# Altium PCB Copy of linobit-PCB.PcbDoc
Units mm, origin at the board's own origin, x right, y up, seen from the top; angles counter-clockwise.
Board outline 110 x 58 mm, 2 copper layers (Top Layer, Bottom Layer); 35 components, 57 nets, 228 pads, 59 vias.
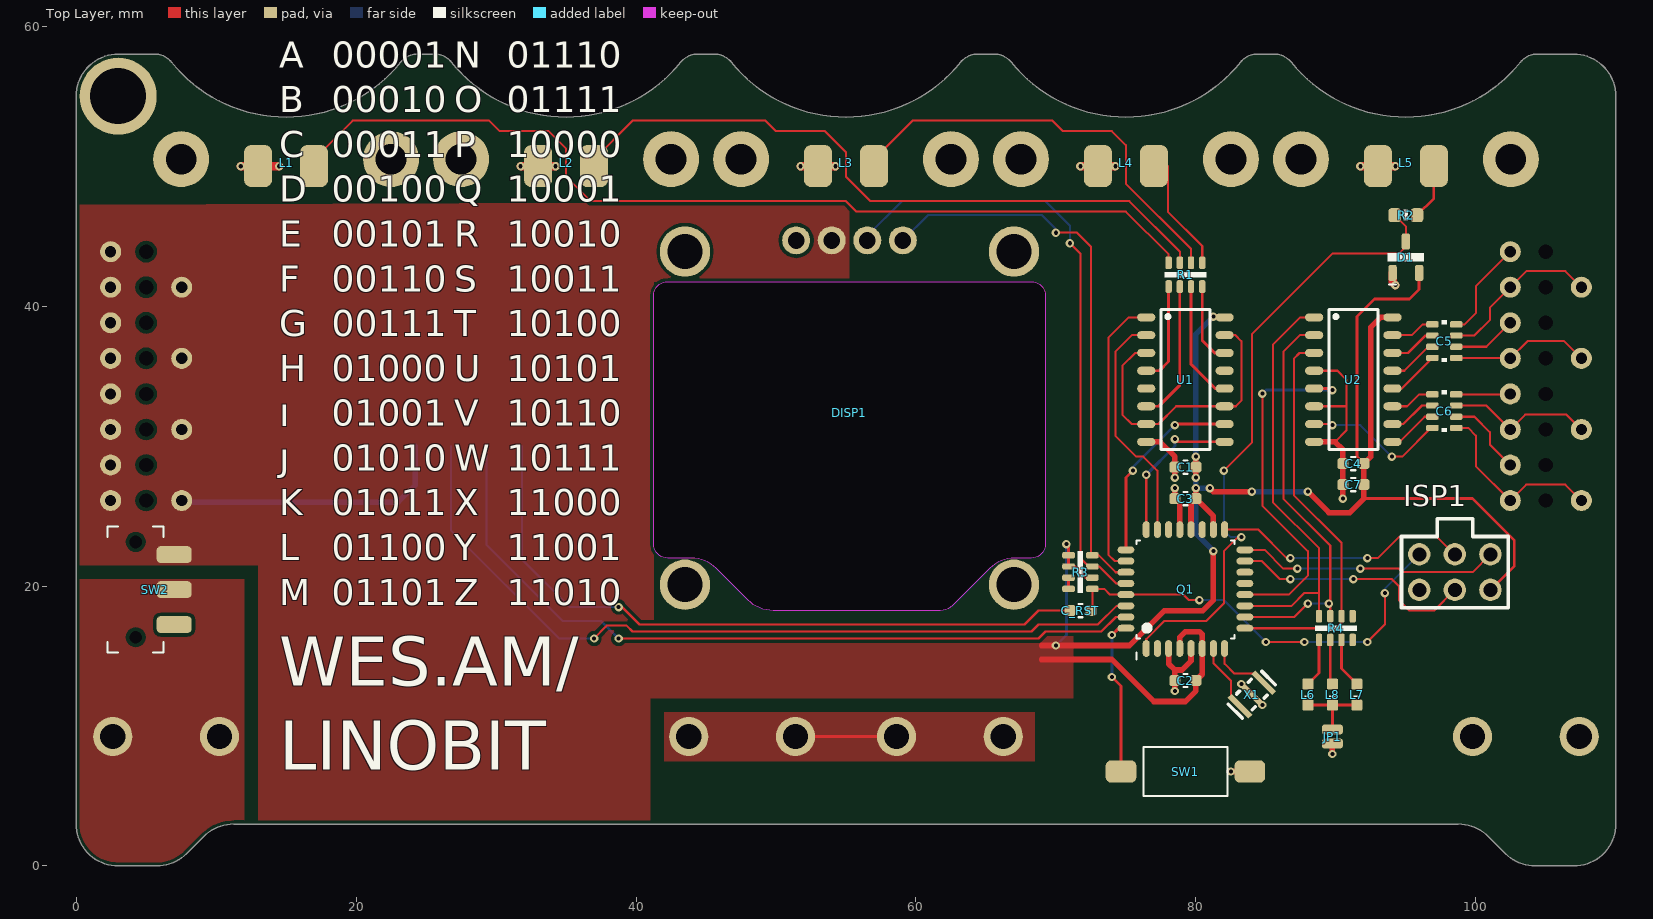
[diagram p0: Top Layer view]
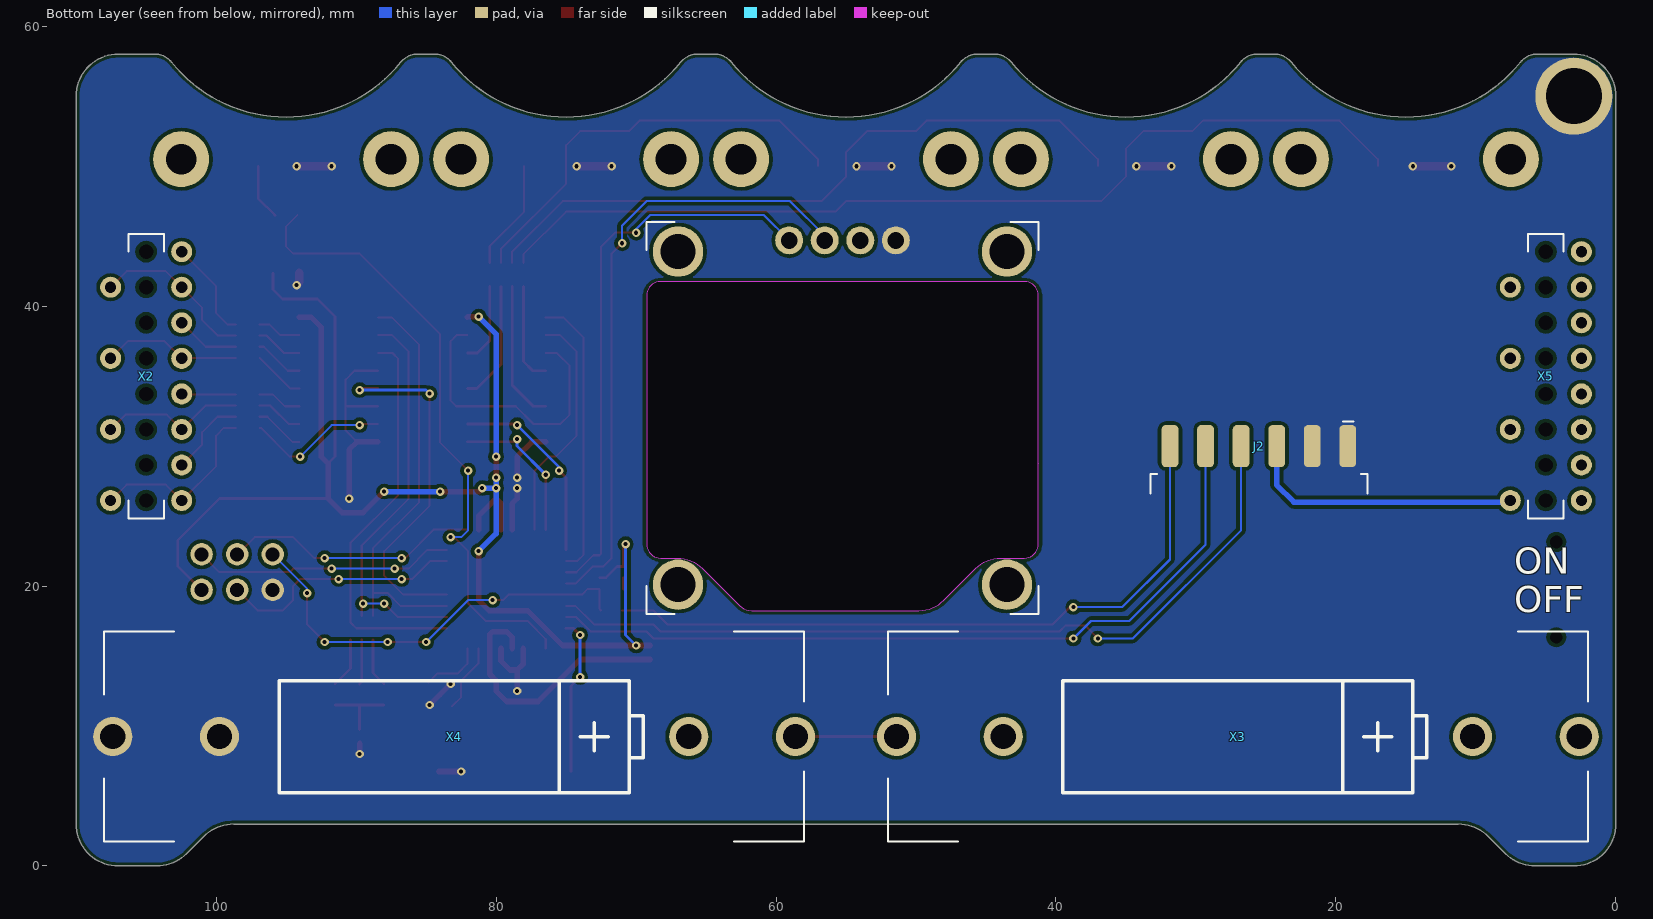
[diagram p1: Bottom Layer view, seen from below]

## Layer stack, top to bottom
Top Solder: solder mask 0.0102, Solder Resist, Dk 3.5
Top Layer: signal copper 0.0356
Dielectric 1: dielectric 0.32, FR-4, Dk 4.8
Bottom Layer: signal copper 0.0356
Bottom Solder: solder mask 0.0102, Solder Resist, Dk 3.5

## Board outline
3,0 5.757,0 ccw(c5.757,3) 7.879,0.879 9.121,2.121 cw(c11.243,0) 11.243,3 98.757,3 cw(c98.757,0) 100.879,2.121 102.121,0.879 ccw(c104.243,3) 104.243,0 107,0 ccw(c107,3) 110,3 110,55 ccw(c107,55) 107,58 104.367,58 ccw(c104.367,56.5) 103.197,57.437 103.197,57.438 cw(c95,64) 86.803,57.438 86.803,57.437 ccw(c85.633,56.5) 85.633,58 84.367,58 ccw(c84.367,56.5) 83.197,57.437 83.197,57.438 cw(c75,64) 66.803,57.438 66.803,57.437 ccw(c65.633,56.5) 65.633,58 64.367,58 ccw(c64.367,56.5) 63.197,57.437 63.197,57.438 cw(c55,64) 46.803,57.438 46.803,57.437 ccw(c45.633,56.5) 45.633,58 44.367,58 ccw(c44.367,56.5) 43.197,57.437 43.197,57.438 cw(c35,64) 26.803,57.438 26.803,57.437 ccw(c25.633,56.5) 25.633,58 24.367,58 ccw(c24.367,56.5) 23.197,57.437 23.197,57.438 cw(c15,64) 6.803,57.438 6.803,57.437 ccw(c5.633,56.5) 5.633,58 3,58 ccw(c3,55) 0,55 0,3 ccw(c3,3)
cut-out: 41.23,28.75

## Design rules (kind name [scope] priority, off if disabled: settings)
BoardOutlineClearance BoardOutlineClearance-Mid [OnLayer('Mid1') or OnLayer('Mid2')] p1: gap=0.5 ignorepadtopadclearanceinfootprint=FALSE
BoardOutlineClearance [All] p2: gap=0.25 ignorepadtopadclearanceinfootprint=FALSE except(0: Arc-SplitContinuation Track-SplitContinuation SMDPad-SplitContinuation THPad-SplitContinuation Via-SplitContinuation Fill-SplitContinuation Poly-SplitContinuation Region-SplitContinuation Text-SplitContinuation)
Clearance Clearance-xPP-xTP-xTT [All] p1: gap=0.15 ignorepadtopadclearanceinfootprint=FALSE except(0: Arc-Hole Track-Hole SMDPad-Hole THPad-Hole Via-Hole Fill-Hole Poly-Hole Region-Hole Text-Hole; 0.25: Arc-Fill Arc-Poly Arc-Region Track-Fill Track-Poly Track-Region SMDPad-Fill SMDPad-Poly SMDPad-Region THPad-Fill THPad-Poly THPad-Region Via-Fill Via-Poly Via-Region Fill-Fill Fill-Poly Fill-Region Poly-Poly Poly-Region Region-Region)
ComponentClearance [All] p1: gap=0.25 collisioncheckmode=3 verticalgap=0.25 showdistances=FALSE
DiffPairsRouting DiffPairsRouting_1 [InDifferentialPair('RS485')] p1: maxlimit=1 minlimit=0.2 mostfreqgap=0.2 toplayer_minwidth=0.2 toplayer_maxwidth=0.6 toplayer_prefwidth=0.6 bottomlayer_minwidth=0.2 bottomlayer_maxwidth=0.6 bottomlayer_prefwidth=0.6 maxuncoupledlength=12.7
DiffPairsRouting [All] p2: maxlimit=0.25 minlimit=0.25 mostfreqgap=0.25 toplayer_minwidth=0.381 toplayer_maxwidth=0.381 toplayer_prefwidth=0.381 bottomlayer_minwidth=0.381 bottomlayer_maxwidth=0.381 bottomlayer_prefwidth=0.381 maxuncoupledlength=12.5
Height [All] p1: minheight=0 maxheight=25 prefheight=12.5
HoleSize HoleSize-PTH [All] p1: absolutevalues=TRUE maxlimit=6 minlimit=0.25 maxpercent=80.000 minpercent=20.000
HoleToHoleClearance [All] p1: gap=0.35 allowstackedmicrovias=TRUE
MinimumAnnularRing "Minimum IAR  >0.45mm" [((ObjectKind = 'Pad') OR (ObjectKind = 'Via')) And (Layer = 'MultiLayer') And (HoleDiameter > AsMM(0.45))] p1: minimumring=0.175 // minimum inner annular ring for pads > 0.45mm finished hole size
MinimumAnnularRing "Minimum IAR <=0.45mm" [((ObjectKind = 'Pad') OR (ObjectKind = 'Via')) And (Layer = 'MultiLayer') And (HoleDiameter <= AsMM(0.45))] p2: minimumring=0.15 // minimum inner annular ring for pads <= 0.45mm finished hole size
MinimumSolderMaskSliver [All] p1: minsoldermaskwidth=0.08
PlaneClearance PlaneClearance-IPI [All] p1: clearance=0.5
PlaneConnect [All] p1: planeconnectstyle=Relief reliefexpansion=0.175 reliefentries=4 reliefconductorwidth=0.2 reliefairgap=0.2
PolygonConnect PolygonConnect-xTW [All] p1: connectstyle=Direct reliefconductorwidth=0.2 reliefentries=4 polygonreliefangle="90 Angle" airgapwidth=0.2
RoutingCorners [All] p1: cornerstyle=45-Degree minsetback=2.5 maxsetback=2.5
RoutingVias "RoutingVias 0.3mm" [All] p1: holewidth=0.3 width=0.6 viastyle="Through Hole" minholewidth=0.3 minwidth=0.6 maxholewidth=0.5 maxwidth=0.8 // finishet hole size <= 0.45mm
SilkToSilkClearance [All] p1: silktosilkclearance=0.2
SilkToSolderMaskClearance SilkscreenOverComponentPads [IsPad] p1: minsilkscreentomaskgap=0.2 clearancetoexposedcopper=TRUE
SolderMaskExpansion "0.3mm Via" [(ObjectKind = 'Via') And (HoleDiameter = AsMM(0.3))] p1: expansion=-0.15 soldermaskfromhole=TRUE
SolderMaskExpansion [All] p2: expansion=0
UnRoutedNet [All] p1: checkbadconnections=TRUE
Width Width-xTW [All] p1: maxlimit=1.5 minlimit=0.15 preferedwidth=0.2
18 further rules are at their usual default settings.

## Components (designator, comment, footprint, x,y, rotation, side; value= is the part's Value field where it differs from the comment)
C1 "*" C0603_N 79.25,28.5 r180 top
C2 "*" C0603_N 79.25,13.25 r180 top
C3 "*" C0603_N 79.25,26.25 r180 top
C4 "*" C0603_N 91.25,28.75 r180 top
C5 "; *" "C0612 Array 4 Caps" 97.75,37.5 r270 top
C6 "; *" "C0612 Array 4 Caps" 97.75,32.5 r270 top
C7 "*" C0603_N 91.25,27.25 r180 top
C_RST "100nF" C0603_N 71.75,18.25 r0 top
D1 "Diode Dual Series" SOT23_N 95,43.5 r90 top
DISP1 "Display I2C OLED" "Display OLED 128x64 0.96in" 55.25,32 r0 top
ISP1 "ISP" "ISP PTH" 98.5,21 r270 top
J2 "FTDI Header" "Header 5W SMD 0.1\"" 25.5,30 r0 bottom
JP1 "Jumper 2W" "Jumper SMD 2W NO" 89.75,9.25 r270 top
L1 "linobyte-coil" linobyte-coil 15,48 r270 top
L2 "linobyte-coil" linobyte-coil 35,48 r270 top
L3 "linobyte-coil" linobyte-coil 55,48 r270 top
L4 "linobyte-coil" linobyte-coil 75,48 r270 top
L5 "linobyte-coil" linobyte-coil 95,48 r270 top
L6 "LED" "LED 0603/1608" 88,12.25 r270 top
L7 "LED" "LED 0603/1608" 91.5,12.25 r270 top
L8 "LED" "LED 0603/1608" 89.75,12.25 r270 top
Q1 "Atmega328P" TQFP32 79.25,19.75 r90 top
R1 "; *" YC164 79.25,42.25 r0 top
R2 "*" R0603 95,46.5 r180 top
R3 "; *" YC164 71.75,21 r90 top
R4 "; *" YC164 90,17 r0 top
SW1 "Switch 2P SPST NO" "TACT FSMSM" 79.25,6.75 r0 top
SW2 "SW SPDT" "SW SPDT JS102011SAQN" 4.25,19.75 r270 top
U1 "MC14043" SOIC16 79.25,34.75 r0 top
U2 "74HC138 - SOIC16" SOIC16 91.25,34.75 r0 top
X1 "Resonator" Resonator 84,12.25 r45 top
X2 "Connector 8W" BCS-108-L-S-PE 105,35 r270 bottom
X3 "Battery Holder AA" "Battery Holder AA" 27,9.25 r0 bottom
X4 "Battery Holder AA" "Battery Holder AA" 83,9.25 r0 bottom
X5 "Connector 8W" BCS-108-L-S-PE 5,35 r270 bottom

## Footprints (in the part's own frame and the unit in brackets; to place one, negate y for a bottom-side part, rotate by r counter-clockwise, add the part's x,y. Pads: shape width x height; smd on the part's side, far side on the other; paste and mask are expansions set on the pad)
"Battery Holder AA" [mm] "Keystone 92 x2"
  round 2.8 hole 1.8: +(-24.385,0) +(-16.765,0) -(16.765,0) -(24.385,0)
  silkscreen extent -25,-7.5 25,7.5, body extent -26.05,-7.49 26.05,7.49, height 15.5
BCS-108-L-S-PE [mm] "Header 8 through board 2.54mm 0.1in"
  round 1.5 hole 0.8 paste+0 mask+0.102: 1(-8.89,2.54) 2(-6.35,-2.54) 2(-6.35,2.54) 3(-3.81,2.54) 4(-1.27,-2.54) 4(-1.27,2.54) 5(1.27,2.54) 6(3.81,-2.54) 6(3.81,2.54) 7(6.35,2.54) 8(8.89,-2.54) 8(8.89,2.54)
  oval 0x2 hole 1.02 unplated paste+0 mask+0.102: ""(-8.89,0) ""(-6.35,0) ""(-3.81,0) ""(-1.27,0) ""(1.27,0) ""(3.81,0) ""(6.35,0) ""(8.89,0)
  silkscreen extent -10.16,-1.27 10.16,1.27, body extent -10.16,-2.67 10.16,2.67, height 7.37
C0603_N [mm] "Capacitor, Yageo CC Class2, SM0603, IPC Medium Density"
  rrect50% 0.8x0.8 smd: 1(-0.75,0) 2(0.75,0)
  silkscreen extent -0.15,-0.48 0.15,0.48, body extent -0.9,-0.5 0.9,0.5, height 0.9
"C0612 Array 4 Caps" [mm]
  rrect50% 0.45x0.9 smd: 1(-1.2,-0.85) 2(-0.4,-0.85) 3(0.4,-0.85) 4(1.2,-0.85) 5(1.2,0.85) 6(0.4,0.85) 7(-0.4,0.85) 8(-1.2,0.85)
  silkscreen extent -1.5,-0.2 1.5,0.2, body extent -1.68,-0.88 1.68,0.88, height 0.71
"Display OLED 128x64 0.96in" [mm]
  round 2 hole 1.2: 1(-3.81,12.7) 2(-1.27,12.7) 3(1.27,12.7) 4(3.81,12.7)
  round 3.6 hole 2.5: TAB(-11.75,-11.9) TAB(-11.75,11.9) TAB(11.75,-11.9) TAB(11.75,11.9)
  Keep-Out Layer board cut-out: -13,9.75 13,9.75 13.383,9.674 13.707,9.457 13.924,9.133 14,8.75 14,8.75 14,-9 13.924,-9.383 13.707,-9.707 13.383,-9.924 13,-10 13,-10 11.802,-10 10.83,-10.193 10.006,-10.744 10.006,-10.744 7.354,-13.396 6.962,-13.658 6.5,-13.75 6.5,-13.75 -5.448,-13.75 -6.42,-13.557 -7.244,-13.006 -7.244,-13.006 -9.506,-10.744 -10.33,-10.193 -11.302,-10 -11.302,-10 -13,-10 -13.383,-9.924 -13.707,-9.707 -13.924,-9.383 -14,-9 -14,-9 -14,8.75 -13.924,9.133 -13.707,9.457 -13.383,9.674 -13,9.75
"Header 5W SMD 0.1\"" [mm]
  rrect50% 1.2x3 smd: 1(-6.35,0) 2(-3.81,0) 3(-1.27,0) 4(1.27,0) 5(3.81,0) 6(6.35,0)
  silkscreen extent -7.75,-1.75 7.75,3.4, body extent -7.62,-1.09 7.62,11.86, height 3.17
"ISP PTH" [mm]
  round 1.6 hole 1 paste-2: 1(-1.27,2.54) 2(-1.27,0) 3(-1.27,-2.54) 4(1.27,-2.54) 5(1.27,0) 6(1.27,2.54)
  silkscreen extent -3.81,-3.81 2.54,3.81
"Jumper SMD 2W NO" [mm]
  rrect50% 0.7x1.5 smd paste-1: 1(-0.5,0) 2(0.5,0)
"LED 0603/1608" [mm] "Chip Diode, 2-Leads, Body 1.60x0.80mm, IPC Medium Density"
  rrect30% 0.8x0.8 smd: 1(0.75,0) 2(-0.75,0)
  silkscreen extent 0.13,-0.23 0.13,0.23, body extent -0.8,-0.4 0.8,0.4, height 0.53
linobyte-coil [mm]
  rrect50% 3x2 smd: 1(-2,2) 2(-2,-2)
  round 4 / inner round 2.6 / far side round 4 hole 2.2: M2(-2.5,7.5) M2(-2.5,-7.5)
  body extent -24,-9.5 0,9.5, height 2
R0603 [mm] "Chip Resistor; Body 1.6 x 0.9 mm (LxW typ)"
  rrect50% 0.9x1 smd: 1(-0.8,0) 2(0.8,0)
  silkscreen extent -0.15,-0.38 0.15,0.38, body extent -0.8,-0.4 0.8,0.4, height 0.45
Resonator [mm] "PRQC Type C - Kyocera"
  rect 0.4x2.1 smd: 1(-1.2,0) 2(0,0) 3(1.2,0)
  silkscreen extent -1.68,-0.8 1.68,0.8, body extent -1.6,-0.65 1.6,0.65, height 0.7
SOIC16 [mm]
  oval 1.3x0.58 smd: 1(-2.8,4.445) 2(-2.8,3.175) 3(-2.8,1.905) 4(-2.8,0.635) 5(-2.8,-0.635) 6(-2.8,-1.905) 7(-2.8,-3.175) 8(-2.8,-4.445) 9(2.8,-4.445) 10(2.8,-3.175) 11(2.8,-1.905) 12(2.8,-0.635) 13(2.8,0.635) 14(2.8,1.905) 15(2.8,3.175) 16(2.8,4.445)
  silkscreen extent -1.75,-5 1.75,5, body extent -3,-4.95 3,4.95, height 1.4
SOT23_N [mm] "SOT23, 3-Leads, Body 2.9x1.3mm, Pitch 0.95mm, Lead Span 2.5mm, IPC Medium Density"
  rrect50% 1.15x0.6 smd: 1(-1.125,0.95) 2(-1.125,-0.95) 3(1.125,0)
  silkscreen extent -1.95,-1.3 0.3,1.3, body extent -0.7,-1.5 0.7,1.5, height 1.1
"SW SPDT JS102011SAQN" [mm]
  rrect50% 1.2x2.5 smd paste+0 mask+0.102: 1(-2.5,2.75) 2(0,2.75) 3(2.5,2.75)
  rrect50% 0x2.5 hole 0.9 unplated paste+0 mask+0.102: ""(-3.4,0) ""(3.4,0)
  silkscreen extent -4.5,-2 4.5,2, body extent -4.5,-4.5 4.5,2, height 3.5
"TACT FSMSM" [mm]
  rrect50% 2.2x1.6 smd paste+0 mask+0.102: 1(-4.6,0) 2(4.6,0)
  silkscreen extent -3,-1.75 3,1.75
TQFP32 [mm]
  oval 1.2x0.5 smd: 1(-4.212,2.8) 2(-4.212,2) 3(-4.212,1.2) 4(-4.212,0.4) 5(-4.212,-0.4) 6(-4.212,-1.2) 7(-4.212,-2) 8(-4.212,-2.8) 17(4.288,-2.8) 18(4.288,-2) 19(4.288,-1.2) 20(4.288,-0.4) 21(4.288,0.4) 22(4.288,1.2) 23(4.288,2) 24(4.288,2.8)
  oval 0.5x1.2 smd: 9(-2.762,-4.25) 10(-1.962,-4.25) 11(-1.162,-4.25) 12(-0.362,-4.25) 13(0.438,-4.25) 14(1.238,-4.25) 15(2.038,-4.25) 16(2.838,-4.25) 25(2.838,4.25) 26(2.038,4.25) 27(1.238,4.25) 28(0.438,4.25) 29(-0.362,4.25) 30(-1.162,4.25) 31(-1.962,4.25) 32(-2.762,4.25)
  silkscreen extent -5,-3.5 3.5,3.5, body extent -4.47,-4.51 4.55,4.51, height 1.55
YC164 [mm] "4 × 0603 (8P4R)  Resistor Array SMD"
  rrect50% 0.45x0.9 smd: 1(-1.2,-0.85) 2(-0.4,-0.85) 3(0.4,-0.85) 4(1.2,-0.85) 5(1.2,0.85) 6(0.4,0.85) 7(-0.4,0.85) 8(-1.2,0.85)
  silkscreen extent -1.5,-0.2 1.5,0.2, body extent -1.68,-0.88 1.68,0.88, height 0.71

## Part data
C1 C2 C3 C4 C7 C_RST: library part Capacitor, "Capacitor MLCC", Manufacturer=Yageo, Manufacturer Part Number=CC0603KRX7R9BB104, Package=0603, Supplier Part Number 1=1362556, Tolerance (%)=10, Category=Capacitor, ComponentLink1Description="Manufacturer Website", ComponentLink1URL=http://www.yageo.com, Supplier 1=Farnell, Supplier 2=Digi-Key, Supplier Part Number 2=311-1344-1-ND
C5 C6: library part "Capacitor Array - 4P"
R1 R3 R4: library part "Resistor Array - 4P"
R2: library part Resistor, PackageDocument=Mar-2003, Code_IPC="1608 [0603]", ComponentLink1Description="Manufacturer Link", ComponentLink1URL=http://www.panasonic.com/industrial/components/resistive_products.htm, ComponentLink2Description=Datasheet, ComponentLink2URL=http://www.panasonic.com/industrial/components/pdf/AOA0000CE2.pdf, LatestRevisionDate=19-Mar-2004, LatestRevisionNote="Silkscreen size reduced.", PackageReference=3-0603, Published=17-Dec-2003, Publisher="Altium Limited"

## Free pads (board coordinates)
  round 5.5 hole 4 paste+0 mask+0.102: ""(3,55)

## Via types
v1: diameter 0.6, hole 0.3, Top Layer to Bottom Layer, 59 vias

## Nets (pads, with @x,y where several pads share a name; then routed paths per layer and width w, separated by ;. In a path a pad name is that pad's centre, name@x,y a point inside that pad or via, vN(x,y) a via of type N, cw(c..) or ccw(c..) an arc to the next point about the centre after c; other vN are vias at no path point)
COIL0: L1.1 R1.8 | length 68.4
  Top Layer w0.15: L1.1 17,50.5 19.75,53.25 29.5,53.25 30.25,52.5 33.75,52.5 35,51.25 35,49.25 36.75,47.5 55,47.5 55.75,46.75 75,46.75 78.05,43.7 R1.8
COIL1: L2.1 R1.7 | length 49.2
  Top Layer w0.15: L2.1 37,50.5 39.75,53.25 49.25,53.25 50,52.5 53.5,52.5 55,51 55,49.25 56.75,47.5 75.25,47.5 78.85,43.9 R1.7
COIL2: L3.1 R1.6 | length 30.7
  Top Layer w0.15: L3.1 57,50.5 59.75,53.25 69.75,53.25 70.5,52.5 74,52.5 75,51.5 75,48.75 79.65,44.1 R1.6
COIL3: L4.1 R1.5 | length 7.9
  Top Layer w0.15: L4.1@78,50 78,46.75 80.45,44.3 R1.5
COIL4: L5.1 R2.1 | length 4
  Top Layer w0.2: R2.1 97,47.7 L5.1
DECODER0: Q1.11 R4.8 U2.1 | length 30.2
  Top Layer w0.15: Q1.11 86.837,18.587 87.75,19.5 88.8,19.5 ; U2.1 87.445,39.195 85.5,37.25 85.5,26 88.8,22.7 88.8,19.5 ; R4.8 88.8,19.5
DECODER1: Q1.10 R4.7 U2.2 | length 29.4
  Top Layer w0.15: Q1.10 87.037,17.787 v1(88,18.75) ; U2.2 87.425,37.925 86.25,36.75 86.25,26.25 89.6,22.9 R4.7
  Bottom Layer w0.15: v1(88,18.75) v1(89.5,18.75)
DECODER2: Q1.9 R4.6 U2.3 | length 28.9
  Top Layer w0.15: Q1.9 89.987,16.987 90.4,17.4 R4.6 90.4,23.1 87,26.5 87,36.25 87.405,36.655 U2.3
DECODER_EN: Q1.12 U2.5 | length 25.9
  Top Layer w0.15: Q1.12 86.637,19.387 88,20.75 88,22.5 84.75,25.75 v1(84.75,33.75)
  Top Layer w0.2: U2.5 89.635,34.115 v1(89.75,34)
  Bottom Layer w0.2: v1(84.75,33.75) 85,34 v1(89.75,34)
GND: C1.2 C2.2 C3.2 C4.2 C7.2 D1.1 DISP1.1 ISP1.4 J2.1 J2.2 JP1.2 L1.2 L2.2 L3.2 L4.2 L5.2 pad. Q1.3 Q1.5 Q1.21 SW1.2 U1.8 U2.4 U2.6 U2.8 X1.2 X4.- | length 46.3
  Top Layer w0.15: U2.6 90.665,32.845 90.75,32.93 ; U2.4 90.115,35.385 90.75,34.75 90.75,32.93 ; 89.945,30.305 90.75,31.11 90.75,32.93
  Top Layer w0.4: U1.8 77.445,30.305 78.5,29.25 C1.2 v1(78.5,27.75) ; Q1.3 78.05,14.45 78.5,14 ; v1(78.5,12.5) C2.2 78.5,14 ; v1(78.5,27) C3.2 78.85,25.9 Q1.21 ; Q1.5 79.65,14.65 79,14 78.5,14 ; v1(82.5,6.75) SW1.2@84.1,6.75 ; v1(83.25,13) X1.2 v1(84.75,11.5) ; U2.8 89.945,30.305 90.5,29.75 C4.2 v1(90.5,26.25) ; v1(89.75,8) JP1.2
  Top Layer w0.6: v1(11.75,50) L1.2 v1(14.5,50) ; v1(31.75,50) L2.2 v1(34.25,50) ; v1(51.75,50) L3.2 v1(54.25,50) ; v1(71.75,50) L4.2 v1(74.25,50) ; v1(91.75,50) L5.2 v1(94.25,50) ; D1.1 94.05,41.7 v1(94.25,41.5)
INTERRUPT: D1.3 Q1.1 R2.2 | length 45.1
  Top Layer w0.15: Q1.1 76.45,16.2 77.75,17.5 80.75,17.5 82,18.75 82,22.5 83,23.5 v1(83.25,23.5) ; v1(82,28.25) 84,30.25 84,38 89.75,43.75 94.5,43.75 95,44.25 D1.3 95,45.7 R2.2
  Bottom Layer w0.15: v1(82,28.25) 82,24 82.5,23.5 v1(83.25,23.5)
LATCH0: Q1.23 U1.2 | length 16.9
  Top Layer w0.15: U1.2 75.425,37.925 74.25,36.75 74.25,30.75 75.75,29.25 76.25,29.25 77.25,28.25 Q1.23
LATCH1: Q1.24 U1.9 | length 10.9
  Top Layer w0.2: Q1.24 v1(76.45,27.95) ; v1(78.5,30.5) 78.695,30.305 U1.9
  Bottom Layer w0.2: v1(76.45,27.95) 78.5,30 v1(78.5,30.5)
LATCH2: Q1.25 U1.10 | length 13.9
  Top Layer w0.2: Q1.25 75,27.75 v1(75.5,28.25) ; v1(78.5,31.5) 78.575,31.575 U1.10
  Bottom Layer w0.2: v1(75.5,28.25) 75.5,28.5 v1(78.5,31.5)
LATCH3: Q1.26 U1.1 | length 20.2
  Top Layer w0.15: Q1.26 74.213,21.787 73.75,22.25 73.75,37.75 75.195,39.195 U1.1
LATCH_EN: U1.5
MISO: ISP1.1 Q1.16 | length 18.7
  Top Layer w0.15: Q1.16 84.913,22.587 86.25,21.25 v1(87.25,21.25) ; v1(91.75,21.25) 94.5,21.25 94.75,21 99.77,21 ISP1.1
  Bottom Layer w0.15: v1(87.25,21.25) v1(91.75,21.25)
MOSI: ISP1.5 Q1.15 | length 17.7
  Top Layer w0.15: Q1.15 84.713,21.787 86,20.5 v1(86.75,20.5) ; v1(91.25,20.5) 94,20.5 94.5,20 94.5,19 95.25,18.25 97.02,18.25 ISP1.5
  Bottom Layer w0.15: v1(86.75,20.5) v1(91.25,20.5)
NetC5_1: C5.1 U2.15 | length 3.2
  Top Layer w0.15: U2.15 95.425,37.925 96.2,38.7 C5.1
NetC5_2: C5.2 U2.14 | length 3.4
  Top Layer w0.15: U2.14 95.155,36.655 96.4,37.9 C5.2
NetC5_3: C5.3 U2.13 | length 3.6
  Top Layer w0.15: U2.13 94.885,35.385 96.6,37.1 C5.3
NetC5_4: C5.4 U2.12 | length 3.8
  Top Layer w0.15: U2.12 94.715,34.115 C5.4
NetC5_5: C5.5 X2.4 | length 10
  Top Layer w0.15: C5.5 102.43,36.3 102.46,36.27 103.69,37.5 106.31,37.5 X2.4@107.54,36.27
NetC5_6: C5.6 X2.3 | length 4.6
  Top Layer w0.15: C5.6 100.75,37.1 X2.3
NetC5_7: C5.7 X2.2 | length 11.8
  Top Layer w0.15: C5.7 99.9,37.9 101,39 101,39.89 102.46,41.35 103.61,42.5 106.39,42.5 X2.2@107.54,41.35
NetC5_8: C5.8 X2.1 | length 7.1
  Top Layer w0.15: C5.8 99.2,38.7 100,39.5 100,41.43 X2.1
NetC6_1: C6.1 U2.11 | length 3.2
  Top Layer w0.15: U2.11 95.095,32.845 95.95,33.7 C6.1
NetC6_2: C6.2 U2.10 | length 3.4
  Top Layer w0.15: U2.10 94.825,31.575 96.15,32.9 C6.2
NetC6_3: C6.3 U2.9 | length 3.6
  Top Layer w0.15: U2.9 94.555,30.305 96.35,32.1 C6.3
NetC6_4: C6.4 U2.7 | length 10.3
  Top Layer w0.15: U2.7 89.675,31.575 v1(89.75,31.5) ; v1(94,29.25) 94.75,29.25 96.8,31.3 C6.4
  Bottom Layer w0.15: v1(89.75,31.5) 91.75,31.5 v1(94,29.25)
NetC6_5: C6.5 X2.8 | length 13.3
  Top Layer w0.15: C6.5 99.45,31.3 100,30.75 100,28.57 102.46,26.11 103.6,27.25 106.4,27.25 X2.8@107.54,26.11
NetC6_6: C6.6 X2.7 | length 5.8
  Top Layer w0.15: C6.6 99.9,32.1 101,31 101,30.11 X2.7
NetC6_7: C6.7 X2.6 | length 10.5
  Top Layer w0.15: C6.7 100.75,32.9 102.46,31.19 103.52,32.25 106.48,32.25 X2.6@107.54,31.19
NetC6_8: C6.8 X2.5 | length 3.9
  Top Layer w0.15: C6.8 102.43,33.7 X2.5
NetC_RST_1: C_RST.1 J2.6 | length 49.6
  Top Layer w0.15: v1(38.75,18.5) 39,18.5 40.25,17.25 67.75,17.25 68.75,18.25 C_RST.1
  Bottom Layer w0.15: J2.6 31.85,21.9 35.25,18.5 v1(38.75,18.5)
NetJP1_1: JP1.1 L6.1 L7.1 L8.1 | length 5.3
  Top Layer w0.2: L6.1 L8.1 ; JP1.1 L8.1 ; L7.1 L8.1
NetL6_2: L6.2 R4.1 | length 3.5
  Top Layer w0.2: L6.2 88.8,13.8 R4.1
NetL7_2: L7.2 R4.3 | length 3.6
  Top Layer w0.2: R4.3 90.4,14.1 L7.2
NetL8_2: L8.2 R4.2 | length 3.2
  Top Layer w0.2: R4.2 89.6,13.15 L8.2
NetQ1_7: Q1.7 X1.1 | length 4.9
  Top Layer w0.15: Q1.7 81.25,14.5 82.5,13.25 82.5,12.053 X1.1
NetQ1_8: Q1.8 X1.3 | length 4.4
  Top Layer w0.15: Q1.8 82.05,14.45 82.75,13.75 84.197,13.75 X1.3
NetQ1_32: Q1.32 SW1.1 | length 11.2
  Top Layer w0.2: v1(74,13.5) 74.65,12.85 SW1.1 ; v1(74,16.5) 74.487,16.987 Q1.32
  Bottom Layer w0.2: v1(74,13.5) v1(74,16.5)
NetR1_1: R1.1 U1.4 | length 7.2
  Top Layer w0.2: U1.4 77.385,35.385 78.05,36.05 R1.1
NetR1_2: R1.2 U1.6 | length 10.1
  Top Layer w0.2: U1.6 77.345,32.845 78.85,34.35 R1.2
NetR1_3: R1.3 U1.12 | length 8.7
  Top Layer w0.2: R1.3 79.65,35.85 81.385,34.115 U1.12
NetR1_4: R1.4 U1.14 | length 5.8
  Top Layer w0.2: R1.4 80.45,37.55 81.345,36.655 U1.14
NetR3_7: R3.7 R3.8 | length 0.8
  Top Layer w0.2: R3.8 R3.7
NetSW2_2: SW2.2 X3.+
NetU1_3: U1.3 U1.7 U1.11 U1.15 | length 20.7
  Top Layer w0.15: U1.3 75.655,36.655 74.75,35.75 74.75,32.25 75.425,31.575 U1.7 77.325,31.575 78.595,32.845 U1.11 82.845,32.845 83.25,33.25 83.25,37.5 82.825,37.925 U1.15
NetX3_-: X3.- X4.+ | length 7.2
  Top Layer w0.2: X3.-@51.385,9.25 X4.+@58.615,9.25
RST: C_RST.2 ISP1.3 Q1.29 R3.1 | length 30.6
  Top Layer w0.15: C_RST.2 72.6,18.35 R3.1 73.45,19.8 73.863,19.387 Q1.29 79.113,19.387 79.5,19 v1(80.25,19) ; v1(85,16) v1(87.75,16) ; v1(92.25,16) 93.5,17.25 v1(93.5,19.5)
  Bottom Layer w0.15: v1(80.25,19) 82,19 v1(85,16) ; v1(87.75,16) v1(92.25,16) ; v1(93.5,19.5) 93.5,19.81 ISP1.3
RXD: J2.4 Q1.30 | length 58.8
  Top Layer w0.15: v1(37,16.25) 37,16.281 37.887,17.169 39.331,17.169 39.75,16.75 68.25,16.75 68.75,17.25 73,17.25 74.337,18.587 Q1.30
  Bottom Layer w0.15: J2.4 26.77,23.98 34.5,16.25 v1(37,16.25)
SCK: ISP1.2 Q1.17 | length 18.4
  Top Layer w0.15: Q1.17 84.463,24.037 86.5,22 v1(86.75,22) ; v1(92.25,22) 93,22 94.5,23.5 97.25,23.5 98.48,22.27 ISP1.2
  Bottom Layer w0.15: v1(86.75,22) v1(92.25,22)
SCL: DISP1.3 Q1.28 R3.3 | length 44.6
  Top Layer w0.15: v1(71,44.5) 71.75,43.75 71.75,22 72.35,21.4 R3.3 73.1,21.4 74.313,20.187 Q1.28
  Bottom Layer w0.15: DISP1.3 56.52,45.02 59,47.5 69.25,47.5 71,45.75 v1(71,44.5)
SDA: DISP1.4 Q1.27 R3.4 | length 40.3
  Top Layer w0.15: v1(70,45.25) 71.5,45.25 72.5,44.25 72.5,22.3 R3.4 73.05,22.2 74.263,20.987 Q1.27
  Bottom Layer w0.15: DISP1.4 60.86,46.5 69,46.5 70,45.5 v1(70,45.25)
TXD: J2.5 Q1.31 | length 56.2
  Top Layer w0.15: v1(38.75,16.25) 68.75,16.25 69.25,16.75 73.25,16.75 74.287,17.787 Q1.31
  Bottom Layer w0.15: J2.5 29.31,22.94 34.75,17.5 37.5,17.5 v1(38.75,16.25)
V+: C1.1 C2.1 C3.1 C4.1 C7.1 D1.2 DISP1.2 ISP1.6 J2.3 Q1.4 Q1.6 Q1.18 Q1.20 R3.2 R3.5 R3.6 SW2.1 U1.16 U2.16 X5.1 X5.2 X5.3 X5.4 X5.5 X5.6 X5.7 X5.8 | length 153.1
  Top Layer w0.2: v1(70.75,23) 70.9,22.85 R3.5 R3.6 71.35,21.4 72.15,20.6 R3.2 ; 92,26.25 99.75,26.25 102.75,23.25 102.75,21.44 ISP1.6 ; C4.1 91.5,29.25 91.5,39.25 92.75,40.5 95.25,40.5 95.95,41.2 D1.2
  Top Layer w0.4: 69,14.75 74,14.75 77,11.75 79.25,11.75 80,12.5 C2.1 80.45,13.7 Q1.6 80.45,16.55 80.25,16.75 79.25,16.75 78.85,16.35 Q1.4 ; 69,15.75 v1(70,15.75) 75.25,15.75 77.75,18.25 80.5,18.25 81.25,19 v1(81.25,22.5) ; Q1.20 79.65,25.9 C3.1 ; v1(80,27) C3.1 ; v1(80,27.75) C1.1 v1(80,29.25) ; v1(81,27) 81.25,26.75 v1(84,26.75) ; Q1.18 81.25,25 C3.1 ; v1(81.25,39.25) 81.995,39.25 U1.16 ; v1(88,26.75) 89.5,25.25 91,25.25 92,26.25 C4.1 92.5,29.25 92.5,38.5 93.195,39.195 U2.16
  Bottom Layer w0.2: v1(70,15.75) 70.75,16.5 v1(70.75,23)
  Bottom Layer w0.4: X5.8@7.5,26 23,26 24.23,27.23 J2.3 ; v1(80,27.75) v1(80,27) ; v1(80,29.25) 80,38 v1(81.25,39.25) ; v1(81,27) v1(80,27) ; v1(81.25,22.5) 80,23.75 v1(80,27) ; v1(84,26.75) v1(88,26.75)
pads on no net: DISP1.TAB L1.M2 L2.M2 L3.M2 L4.M2 L5.M2 Q1.2 Q1.13 Q1.14 Q1.19 Q1.22 R4.4 R4.5 SW2. SW2.3 U1.13 X2. X5.

## Polygon pours and split planes (outlines as drawn)
GND on Bottom Layer "Bottom Layer-GND" (solid, pour order 4): 0,0 0,60 110,60 110,0
NetSW2_2 on Top Layer "Top Layer-NetSW2_2" (solid, pour order 0): 0,20.5 0,0 12,0 12,20.5
NetX3_- on Top Layer "Top Layer-NetX3_-" (solid, pour order 8): 42,11 42,7.5 68.5,7.5 68.5,11
V+ on Top Layer "Top Layer-V+" (solid, remove dead copper, pour order 6): 55.25,47.449 0,47.25 0,21.5 13,21.5 13,0 41,0 41,12 71.25,12 71.25,16.75 41.25,16.75 41.25,41.75 55.25,41.75

## Silkscreen, mask and mechanical layers (free items; w line width, h text height)
Top Overlay:
  text "A / B / C / D / E / F / G / H / I / J / K / L / M" at 14.5,18 h3.2
  text "00001 / 00010 / 00011 / 00100 / 00101 / 00110 / 00111 / 01000 / 01001 / 01010 / 01011 / 01100 / 01101" at 18.25,18 h3.2
  text "N / O / P / Q / R / S / T / U / V / W / X / Y / Z" at 27,18 h3.2
  text "01110 / 01111 / 10000 / 10001 / 10010 / 10011 / 10100 / 10101 / 10110 / 10111 / 11000 / 11001 / 11010" at 30.75,18 h3.2
  text "WES.AM/ / LINOBIT" at 14.5,5.75 h6
Bottom Overlay:
  text "ON" at 7.25,20.25 h3.2
  text "OFF" at 7.25,17.5 h3.2
Mechanical 1:
  lines w0.15: 42,42.5 68,42.5
Mechanical 5:
  the board outline again, w0.05